# EAGLE board PIDDYBOT_V11 (EAGLE 7.1.0)
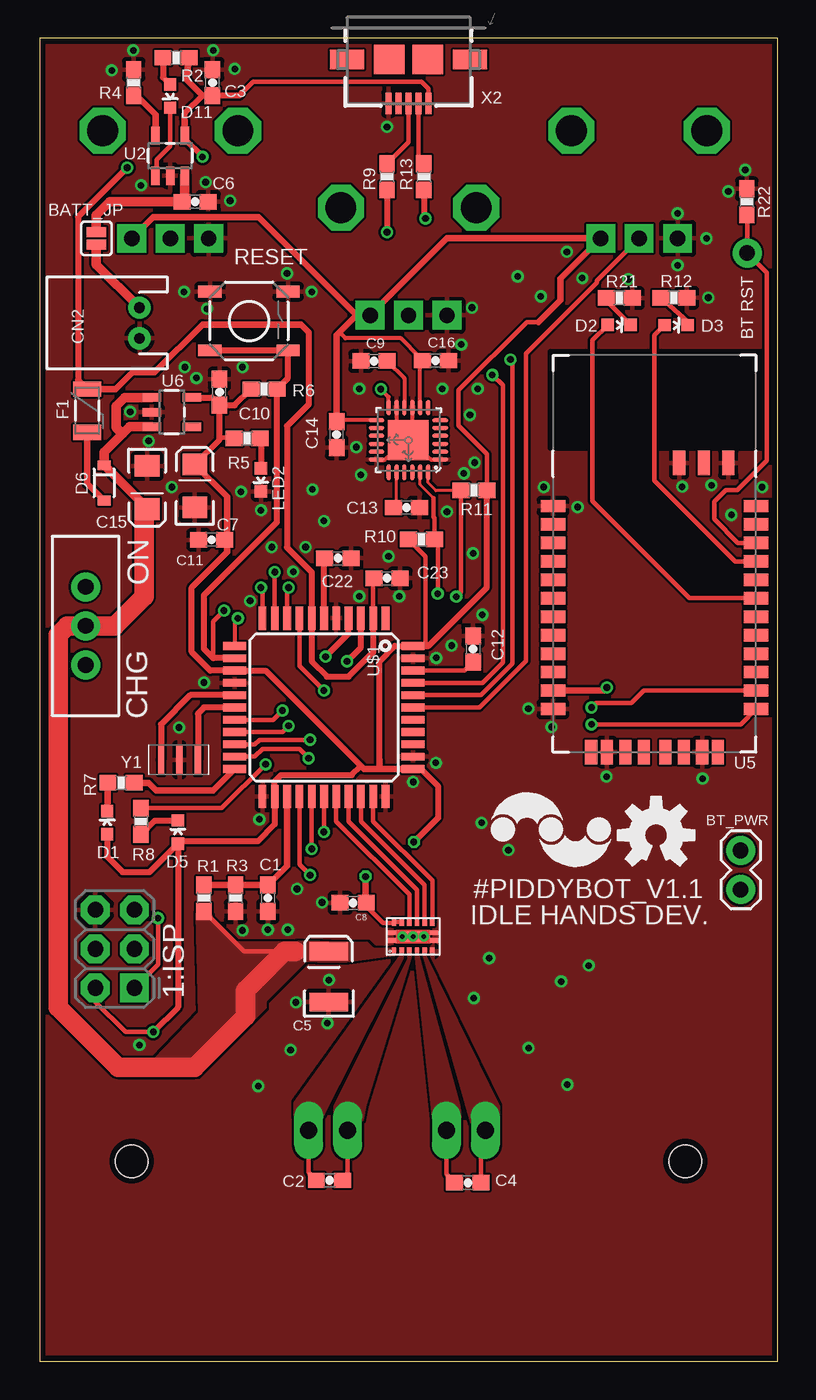
[diagram p0: board, top side]
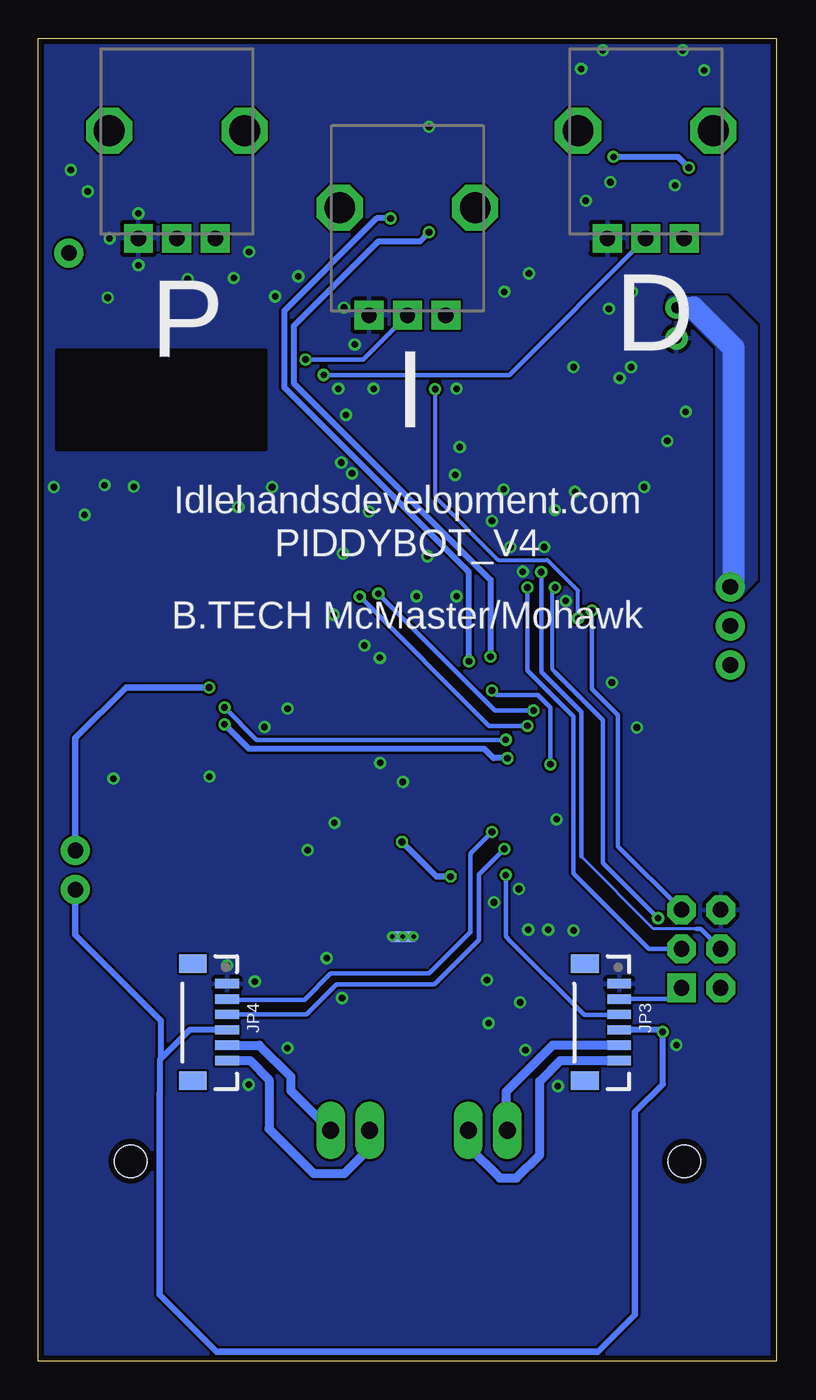
[diagram p1: board, bottom side, seen from below]

Size 48 x 86 mm. Coordinates in mm from the lower left corner, seen from the top.
Outline: 0,0 48,0 48,86 0,86 0,0
Copper layers (1*16): Top 0.0356mm / dielectric 1.5011mm / Bottom 0.0356mm
Design rules "LaenPCBOrder": minimum track width 6mil, minimum drill 13mil, track to track 6mil, track to pad 6mil, pad to pad 6mil, via to via 6mil, smd to smd 6mil, copper to edge 15mil, drill to drill 6mil, minimum pad ring 7mil, minimum via ring 7mil, stop-mask expansion 3mil, vias tented up to drill 0mil, thermal gap 10mil
Net classes: 0 default: width 0.203 mm; 1 vcc: width 0.254 mm
Holes 2.11 mm at 6,13 42,13

## Footprints (pad centres in the part's own frame; a part is rotated, then mirrored left to right if it is on the bottom)
SJ_2S = smd 0.635 x 1.27: 1 -0.412,0; 2 0.412,0
1X02 = drill 1.016 pad 1.88: 1 0,0; 2 2.54,0
0603-CAP = smd 1.1 x 1: 1 -0.85,0; 2 0.85,0
EIA3528 = smd 1.2 x 2.5: A 1.65,0; C -1.65,0
EIA3216 = smd 1.4 x 1.6: A 1.4,0; C -1.4,0
JST-2-PTH = drill 0.7 pad 1.448: 1 -1,0; 2 1,0
LED-0603 = smd 0.8 x 0.8: A 0,-0.75; C 0,0.75
SOD-323 = smd 0.63 x 0.83: 1 -1.15,0; 2 1.15,0
PTC-1206 = smd 1 x 1.8: 1 -1.4,0; 2 1.4,0
1X01NS = drill 1.016 pad 1.88: 1 0,0
1X06-1MM = smd 0.6 x 1.55: 1 -2.54,1.27; 2 -1.54,1.27; 3 -0.54,1.27; 4 0.46,1.27; 5 1.46,1.27; 6 2.46,1.27 | smd 1.2 x 1.8: P$1 -3.84,-0.955; P$2 3.76,-0.955
2X3-NS = drill 1.016 pad 1.88 square: 1 -2.54,-1.27 | drill 1.016 pad 1.88 octagon: 2 -2.54,1.27; 3 0,-1.27; 4 0,1.27; 5 2.54,-1.27; 6 2.54,1.27
1X02_LONGPADS = drill 1.118 pad 1.88 long: 1 0,0; 2 2.54,0
0603-RES = smd 1.1 x 1: 1 -0.85,0; 2 0.85,0
TACTILE_SWITCH_SMD = smd 1.524 x 0.762: 1 -2.54,1.905; 2 2.54,1.905; 3 -2.54,-1.905; 4 2.54,-1.905
SWITCH-SPDT = drill 1.016 pad 1.88: 1 0,2.54; 2 0,0; 3 0,-2.54
QFN-24-4MM2 = smd 1.016 x 0.254: 1 -2.066,1.257; 2 -2.066,0.75; 3 -2.066,0.247; 4 -2.066,-0.287; 5 -2.066,-0.792; 6 -2.066,-1.297; 13 2.086,-1.297; 14 2.086,-0.792; 15 2.086,-0.287; 16 2.086,0.247; 17 2.086,0.75; 18 2.086,1.257 | smd 0.254 x 1.016: 7 -1.267,-2.122; 8 -0.762,-2.122; 9 -0.258,-2.122; 10 0.278,-2.122; 11 0.78,-2.122; 12 1.287,-2.122; 19 1.287,2.082; 20 0.78,2.082; 21 0.278,2.082; 22 -0.258,2.082; 23 -0.762,2.082; 24 -1.267,2.082 | smd 2.616 x 2.616: P$1 0.02,-0.01
SOT23-5 = smd 0.55 x 1.2: 1 -0.95,-1.3; 2 0,-1.3; 3 0.95,-1.3; 4 0.95,1.3; 5 -0.95,1.3
RN41 = smd 0.8 x 1.6: 1 -6.6,-6.6; 2 -5.4,-6.6; 3 -4.2,-6.6; 4 -3,-6.6; 5 -1.8,-6.6; 6 -0.6,-6.6; 7 0.6,-6.6; 8 1.8,-6.6; 9 3,-6.6; 10 4.2,-6.6; 11 5.4,-6.6; 12 6.6,-6.6; 13 6.6,6.6; 14 5.4,6.6; 15 4.2,6.6; 16 3,6.6; 17 1.8,6.6; 18 0.6,6.6; 19 -0.6,6.6; 20 -1.8,6.6; 21 -3,6.6; 22 -4.2,6.6; 23 -5.4,6.6; 24 -6.6,6.6 | smd 1.6 x 0.8: 25 -9.4,4.8; 26 -9.4,3.2; 27 -9.4,1.6; 28 9.4,3.1; 29 9.4,-3.1; 30 9.4,-4.122; 31 9.4,-1.9; 32 9.4,-0.7; 33 9.4,0.7; 34 9.4,1.9; 35 9.4,4.122
SPARKFUN-DIGITALIC_TQFP44 = smd 1.5 x 0.5: 1 -5.8,4; 2 -5.8,3.2; 3 -5.8,2.4; 4 -5.8,1.6; 5 -5.8,0.8; 6 -5.8,0; 7 -5.8,-0.8; 8 -5.8,-1.6; 9 -5.8,-2.4; 10 -5.8,-3.2; 11 -5.8,-4; 23 5.8,-4; 24 5.8,-3.2; 25 5.8,-2.4; 26 5.8,-1.6; 27 5.8,-0.8; 28 5.8,0; 29 5.8,0.8; 30 5.8,1.6; 31 5.8,2.4; 32 5.8,3.2; 33 5.8,4 | smd 0.5 x 1.5: 12 -4,-5.8; 13 -3.2,-5.8; 14 -2.4,-5.8; 15 -1.6,-5.8; 16 -0.8,-5.8; 17 0,-5.8; 18 0.8,-5.8; 19 1.6,-5.8; 20 2.4,-5.8; 21 3.2,-5.8; 22 4,-5.8; 34 4,5.8; 35 3.2,5.8; 36 2.4,5.8; 37 1.6,5.8; 38 0.8,5.8; 39 0,5.8; 40 -0.8,5.8; 41 -1.6,5.8; 42 -2.4,5.8; 43 -3.2,5.8; 44 -4,5.8
WSON-12 = smd 0.28 x 0.5: P1 -1.25,-0.95; P2 -0.75,-0.95; P3 -0.25,-0.95; P4 0.25,-0.95; P5 0.75,-0.95; P6 1.25,-0.95; P7 1.25,0.95; P8 0.75,0.95; P9 0.25,0.95; P10 -0.25,0.95; P11 -0.75,0.95; P12 -1.25,0.95 | drill 0.3 pad 0.406: P$1 0,0; P$2 -0.7,0; P$3 0.7,0 | smd 0.635 x 0.305: THERM1 -1.4,-0.25; THERM2 1.4,-0.25; THERM3 1.4,0.25; THERM4 -1.4,0.25 | smd 1.6 x 0.7: THERMCENTER 0,0; THERMCENTER1 0,0 | smd 1.6 x 0.7 bottom: THERMCENTER2 0,0
ALPS_POT = drill 1 pad 1.88 square: P$1 7,-2.5; P$2 7,0; P$3 7,2.5 | drill 2 octagon: P$4 0,-4.4; P$5 0,4.4
USB_AB_MICRO_1:1_V2 = smd 1.4 x 0.4: D+ 2.85,0; D- 2.85,0.65; GND 2.85,-1.3; ID 2.85,-0.65; VBUS 2.85,1.3 | smd 1.9 x 2: P$6 0,1.25; P$7 0,-1.25 | smd 1.27 x 2.2: P$8 0,4; P$9 0,-4
CSTCR6M = smd 0.4 x 2: 1 -1.2,0; 2 0,0; 3 1.2,0

## Placement (x,y rotation side)
BATT_JP  [SJ_2S]  3.7,73 270 top
BT_PWR  M02PTH  [1X02]  45.6,33.2 270 top
C1  1uF  [0603-CAP]  14.85,30.1 270 top
C2  1uF  [0603-CAP]  18.85,11.75 180 top
C3  4.7uF  [0603-CAP]  11.25,83.12 90 top
C4  1uF  [0603-CAP]  27.85,11.6 0 top
C5  10uf , 20V  [EIA3528]  18.8,25 90 top
C6  4.7uF  [0603-CAP]  10.12,75.38 0 top
C7  10uF  [EIA3216]  10.1,56.9 90 top
C8  0.1uF  [0603-CAP]  20.4,29.8 180 top
C9  0.1uF  [0603-CAP]  21.75,65.03 180 top
C10  1uF  [0603-CAP]  11.7,63 90 top
C11  0.1uF  [0603-CAP]  11.2,53.4 0 top
C12  0.1uF  [0603-CAP]  28.2,46.3 270 top
C13  2.2nF  [0603-CAP]  23.88,55.5 0 top
C14  0.1uF  [0603-CAP]  19.32,60.25 270 top
C15  10uF  [EIA3216]  7,56.8 270 top
C16  10nF  [0603-CAP]  25.75,65.05 0 top
C22  1uF  [0603-CAP]  19.4,52.2 180 top
C23  1uF  [0603-CAP]  22.6,50.9 180 top
CN2  M02JST-PTH-2  [JST-2-PTH]  6.5,67.5 90 top
D1  Green  [LED-0603]  4.4,35 0 top
D2  Green  [LED-0603]  37.7,67.37 270 top
D3  Red  [LED-0603]  41.4,67.36 270 top
D5  Yellow  [LED-0603]  9,34.4 0 top
D6  [SOD-323]  4.2,57.1 270 top
D11  RED  [LED-0603]  8.5,82.25 180 top
F1  500mA  [PTC-1206]  3.1,61.8 270 top
JP2  M01SMDNS  [1X01NS]  46.02,72.05 0 top
JP3  [1X06-1MM]  11.5,22 270 bottom
JP4  [1X06-1MM]  37,22 270 bottom
JP5  [2X3-NS]  4.9,26.8 90 top
LED2  Red  [LED-0603]  14.4,57.3 180 top
LOGO1  IDLEHANDS_LOGOL  [IHD-LOGO-L]  33.3,34.6 0 top
LOGO2  OSHW-LOGOM  [OSHW-LOGO-M]  40.1,34.2 0 top
MTA  M02PTH3  [1X02_LONGPADS]  17.5,15 0 top
MTB  M02PTH3  [1X02_LONGPADS]  29,15 180 top
R1  1M  [0603-RES]  10.7,30.1 270 top
R2  330  [0603-RES]  8.88,84.75 0 top
R3  470k  [0603-RES]  12.75,30.1 90 top
R4  2K  [0603-RES]  6.12,83.12 90 top
R5  1K  [0603-RES]  13.5,60 180 top
R6  10K  [0603-RES]  14.6,63.2 180 top
R7  330  [0603-RES]  5.3,37.6 180 top
R8  330  [0603-RES]  6.6,35.1 270 top
R9  22  [0603-RES]  22.6,77 90 top
R10  10k  [0603-RES]  24.85,53.42 180 top
R11  10k  [0603-RES]  28.25,56.62 0 top
R12  330  [0603-RES]  41.25,69.13 0 top
R13  22  [0603-RES]  25,77 90 top
R21  330  [0603-RES]  37.71,69.12 0 top
R22  10K  [0603-RES]  46,75.38 270 top
RESET  RESET  [TACTILE_SWITCH_SMD]  13.62,67.62 0 top
S4  [SWITCH-SPDT]  3,47.8 0 top
U1  MPU-6050-1  [QFN-24-4MM2]  24,59.88 180 top
U2  MCP73831  [SOT23-5]  8.5,78.38 0 top
U5  BLUETOOTH-RN41  [RN41]  40,49 270 top
U6  MIC5219  [SOT23-5]  8.6,61.7 270 top
U$1  ATMEGA32U4TQFP  [SPARKFUN-DIGITALIC_TQFP44]  18.5,42.5 270 top
U$2  DRV8835  [WSON-12]  24.3,27.6 0 top
U$16  [ALPS_POT]  39,80 270 bottom
U$17  [ALPS_POT]  24,75 270 bottom
U$18  [ALPS_POT]  8.5,80 270 bottom
X2  [USB_AB_MICRO_1:1_V2]  24,84.62 270 top
Y1  8Mhz  [CSTCR6M]  9.1,39.1 180 top

## Library data of the parts
BATT_JP = SparkFun-Passives
BT_PWR CN2 JP3-JP5 MTA MTB = SparkFun-Connectors
C1-C16 C22 C23 D1-D3 D5 D6 D11 F1 JP2 LED2 R1-R13 R21 R22 RESET U2 U6 = SparkFun
LOGO1 = IdleHandsProject
LOGO2 = SparkFun-Aesthetics
S4 U$16-U$18 = SparkFun-Electromechanical
U1 X2 = Testing
U5 = ScratchPad
U$1 = SparkFun-DigitalIC
U$2 = scout
Y1 = murata-filter; MPN: CSTCE8M00G55-R0

## Nets
3.3V: BT_PWR.2 C7.A C8.1 C10.1 C11.2 C14.1 C16.1 D1.A D5.A JP3.4 JP4.4 JP5.2 R5.2 R6.2 R10.2 R11.2 U1.8 U1.13 U6.5 U$1.14 U$1.24 U$1.34 U$1.44 U$2.P11 U$2.P12 U$16.P$3 U$17.P$3 U$18.P$3
A01: C2.2 JP3.5 MTA.1 U$2.P2
A02: C2.1 JP3.6 MTA.2 U$2.P3
AIN1: U$1.29 U$2.P10
AREF: C12.2 U$1.42
AUX_SCL: U1.7
AUX_SDA: U1.6
B01: C4.2 JP4.5 MTB.1 U$2.P5
B02: C4.1 JP4.6 MTB.2 U$2.P4
BATT: C1.1 R1.1 R3.2 U$1.25
BIN1: U$1.31 U$2.P8
CTS: U5.16
D1: D3.C R12.1
D2: D2.C R21.1
D7: U$1.1
D14: R8.1 U$1.8
D+: R9.1 U$1.4
D-: R13.1 U$1.3
GND: C1.2 C3.2 C5.C C6.2 C7.C C8.2 C9.2 C10.2 C11.1 C12.1 C13.2 C14.2 C15.C C16.2 C22.1 C23.1 CN2.1 JP3.1 JP4.1 JP5.6 LED2.C R3.1 R4.2 R12.2 R21.2 R22.1 RESET.1 RESET.2 U1.1 U1.9 U1.11 U1.18 U2.2 U5.1 U5.12 U5.25 U5.27 U5.28 U5.29 U6.2 U$1.5 U$1.15 U$1.23 U$1.33 U$1.35 U$1.43 U$2.P6 U$2.P$1 U$2.P$2 U$2.P$3 U$2.THERM1 U$2.THERM2 U$2.THERM3 U$2.THERM4 U$2.THERMCENTER U$2.THERMCENTER1 U$2.THERMCENTER2 U$16.P$1 U$17.P$1 U$18.P$1 X2.GND Y1.2
INT: U1.12 U$1.12
MISO-MTE_A_1: JP3.2 JP5.1 U$1.11
MOSI: JP5.4 U$1.10
MTE_A_2: JP3.3 U$1.26
MTE_B_1: JP4.3 U$1.27
MTE_B_2: JP4.2 U$1.28
N$1: U$1.17 Y1.1
N$2: U$1.16 Y1.3
N$3: D6.2 F1.2
N$4: U$1.36
N$6: C13.1 U1.20
N$7: C9.1 U1.10
N$8: U$1.37
N$9: D3.A U5.21
N$10: U$1.38
N$11: D2.A U5.19
N$12: BT_PWR.1 U5.11
N$13: D11.A R2.1
N$14: BATT_JP.1 C6.1 U2.3
N$15: C22.2 U$1.6
N$16: R13.2 X2.D-
N$17: R9.2 X2.D+
N$19: D5.C R8.2
N$20: D1.C R7.2
N$38: LED2.A R5.1
PIO4: JP2.1 R22.2 U5.22
POTD: U$1.41 U$18.P$2
POTI: U$1.40 U$17.P$2
POTP: U$1.39 U$16.P$2
PROG: R4.1 U2.5
PWMA: U$1.30 U$2.P9
PWMB: U$1.32 U$2.P7
RAW: C5.A C15.A D6.1 R1.2 S4.2 U6.1 U6.3 U$2.P1
RESET: JP5.5 R6.1 RESET.3 RESET.4 U$1.13
RTS: U5.15
RX-I: U5.14 U$1.20
SCK: JP5.3 U$1.9
SCL: R10.1 U1.23 U$1.18
SDA: R11.1 U1.24 U$1.19
STAT: D11.C U2.1
TX-O: U5.13 U$1.21
TXLED: R7.1 U$1.22
UVCC: C3.1 C23.2 F1.1 R2.2 U2.4 U$1.2 U$1.7 X2.VBUS
V_BATT: BATT_JP.2 CN2.2 S4.1

## Tracks (layer width: path | path; a pad name or v marks a point on that pad's centre or on a via)
3.3V  (via drill 0.43)
  Top 0.254: U1.13 19.4,61.17 C14.1 | 24.9,65.1 C16.1 24.76,64.91 | 24.76,64.91 24.76,65.24 23.5,66.5 19.9,66.5 19.56,66.84 19.46,66.84 | U1.8 24.76,64.91
  Top 0.3: R11.2 29.1,58.98 27.25,60.83 27.25,63.12 31.69,67.56 32.44,67.56 | 5.59,21.4 v7.4,21.4 | 25.1,51.2 25.1,46.5 | C8.1 21.25,29.68 arc45 21.31,29.54 22.35,28.5 22.93,28.5 arc45 U$2.P12 U$2.P11
  Top 0.305: 12.7,60.05 11.7,60.05 11.7,59.9 | 25.1,51.2 25.1,52.33 R10.2 | JP5.2 3.63,23.36 5.59,21.4
  Top 0.4: 13.6,63.05 R6.2 12.7,62.15 C10.1 | U6.5 11.2,62.65 C10.1 | 12.7,60.05 R5.2 | C10.1 11.7,59.9 C7.A 12.2,56.2 | 12.2,52.6 9.9,50.3 9.9,46.1 11.1,44.9 U$1.14 14.7,44.9 20.9,38.7 | 20.9,38.7 21.1,38.5 | D5.A 9.15,33.8 14.2,33.8 15.3,34.9 U$1.24 15.3,37.7 15.7,38.1 20.3,38.1 20.9,38.7 | D1.A 4.4,32.8 5.4,31.8 7.15,31.8 D5.A | D5.A 9,23 v7.4,21.4 | 22.1,39.1 22.1,45.5 23.1,46.5 U$1.44 25.1,46.5 25.3,46.5 29.1,50.3 R11.2 | U$1.34 24.8,38.5 25.9,37.4 25.9,35.3
  Top 0.406: 20.62,68 U$17.P$3 26.5,73 U$16.P$3 33.88,70.38 33.88,69 32.44,67.56 | 20.62,68 14.25,74.38 7.38,74.38 U$18.P$3 | 12.2,56.2 12.2,53.55 C11.2 12.2,53.25 12.2,52.6 | 21.1,38.5 22.1,38.5 | 22.1,38.5 U$1.34 | 22.1,39.1 22.1,38.5 | 25.9,35.3 v24.35,33.75 | v21.2,31.5 21.2,29.92 arc45 C8.1 | 20.62,68 19.46,66.84 19.32,66.7 C14.1
  Bottom 0.4: JP3.4 7.54,21.54 v7.4,21.4 7.4,18 | JP4.4 38.16,21.54 40.05,19.65 | 40.05,19.65 40.1,19.6 40.1,17.4 | 40.05,22.15 40.05,19.65
  Bottom 0.406: v24.35,33.75 22.16,31.56 arc-45 22.02,31.5 v21.2,31.5 | 7.4,18 9.2,16.2 9.2,3 11.6,0.6 36.4,0.6 40.1,4.3 40.1,17.4 | 40.05,22.15 45.6,27.7 BT_PWR.2
A01
  Top 0.3: MTA.1 17.5,12.33 arc45 17.56,12.19 C2.2
  Bottom 0.6: JP3.5 14.56,20.54 17.59,17.51 17.59,15.09 MTA.1
  pour Top (no thermals): 23.45,26.6 23.65,26.6 23.65,26.15 18.45,15.9 16.55,15.9 16.55,16.8 23.45,26.35
A02
  Top 0.3: C2.1 19.98,12.03 arc45 20.04,12.17 MTA.2
  Bottom 0.6: MTA.2 20.04,13.94 18,11.9 16.9,11.9 15.4,13.4 15.4,18.2 14.06,19.54 JP3.6
  pour Top (no thermals): 23.95,26.65 23.95,26.15 19.15,16.6 19.15,15.65 21.05,15.65 21.25,16.65 24.15,26.2 24.15,26.65
AIN1
  Top 0.3: U$1.29 19.3,35.1 24.05,30.35 U$2.P10
AREF
  Top 0.3: U$1.42 27.65,44.9 C12.2
B01
  Top 0.3: MTB.1 28.76,14.76 arc45 28.7,14.62 C4.2
  Bottom 0.6: JP4.5 33.64,20.54 31.6,18.5 31.6,17.6 MTB.1
  pour Top (no thermals): 24.95,26.65 24.95,26.45 28.05,15.45 29.9,16 29.9,16.55 25.15,26.35 25.15,26.65
B02
  Top 0.3: C4.1 26.52,12.08 arc-45 26.46,12.22 MTB.2
  Bottom 0.6: JP4.6 34.24,19.54 33,18.3 33,15.1 30.1,12.2 28.1,12.2 26.46,13.84 MTB.2
  pour Top (no thermals): 24.45,26.65 24.45,26.2 25.55,15.85 27.4,15.8 27.35,16.55 24.65,26.45 24.65,26.65
BATT
  Top 0.406: R1.1 R3.2 C1.1 16.1,32.2 U$1.25
BIN1
  Top 0.3: U$1.31 20.9,35.1 25.05,30.95 U$2.P8
D1
  Top 0.3: D3.C 42.15,67.59 R12.1
D2
  Top 0.3: D2.C 37.06,68.76 R21.1
D14  (via drill 0.43)
  Top 0.3: R8.1 11.85,35.95 v14.7,38.8 | v18.5,43.6 16.9,45.2 U$1.8
  Bottom 0.3: v14.7,38.8 14.7,42.5 15.5,43.3 18.2,43.3 v18.5,43.6
D+  (via drill 0.43)
  Top 0.4: R9.1 v22.6,73.4 | v18.6,45.8 20.1,47.3 U$1.4
  Bottom 0.4: v22.6,73.4 23.2,72.8 25.9,72.8 31.4,67.3 31.4,63.6 18.6,50.8 v18.6,45.8
D-  (via drill 0.43)
  Top 0.4: R13.1 25,74.4 v25.1,74.3 | v20,45.5 20.9,46.4 U$1.3
  Bottom 0.4: v25.1,74.3 26,74.3 32,68.3 32,63.3 20,51.3 v20,45.5
GND  (via drill 0.43)
  Top 0.254: U1.11 23.22,61.18 23.7,60.7 23.9,60.7 24.26,61.06 U1.9 | 22.8,58.9 22.4,58.6 21.9,58.6 U1.18 | 26.08,58.6 25.5,58.6 25.1,58.9 | 26.1,58.6 26.08,58.6 | 26.08,58.6 U1.1
  other vias: 24.3,37.65 20.6,59.42 27.43,66.1 36.88,38 43.12,37.88 28.75,35 14.85,28.05 28.12,68.5 41.5,74.62 43.38,73 41.5,71.25 17.75,56.67 9.4,69.53 10.9,68.42 16.1,70.72 17.7,69.53 35,55.52 45,55.02 47,56.83 32.8,56.83 31.8,42.42 33.3,41.23 28.8,48.52 26.8,46.52 30.5,33.23 6.5,20.55 23.4,49.73 22.7,52.33 20.8,49.73 14.3,35.23 8.6,56.83 7.1,59.83 9.45,64.62 12.7,84.03 11.3,85.22 6.1,85.22 4.7,83.92 20.8,63.23 26.2,63.23 31.1,70.53 32.6,69.22 34.3,72.12 35.3,70.42 28.5,63.23 28,61.52 10.2,63.92 13.2,64.62 5.9,61.73 14.4,55.33 13.1,56.52 38.3,70.35 43.5,69.15 44.8,76.05 45.9,77.45 22.6,80.25 6.6,76.45 10.8,76.65 12.4,75.45 35.73,25.71 33.92,24.68 9.07,41.2 25.77,38.9 34.33,17.98 14.22,17.88 17.3,52.92 15.1,52.92 25.8,45.73 10.7,44.12 28.3,58.42 27.6,57.73 43.7,56.95 41.8,56.85 13.7,49.42 16.5,51.33 18.5,54.62 26.5,55.23 28.2,52.52 20.9,57.62 13.2,28 16.75,30.7 16.15,28.05 31.8,20.36 16.32,20.23 16.68,23.32 18.82,24.77 18.73,21.98 18.38,29.82 28.25,23.6 29.25,26.2
  pour Top (rank 6): 0,0 48,0 48,86 0,86
  pour Bottom (rank 6): 0,0 48,0 48,86 0,86
INT  (via drill 0.43)
  Top 0.254: U1.12 22.71,62.69 v22.2,63.2 | U$1.12 12.7,48.1 v12.9,48.3
  Bottom 0.254: v22.2,63.2 22.2,56.2 18.1,52.1 14.9,52.1 12.9,50.1 v12.9,48.3
MISO-MTE_A_1  (via drill 0.43)
  Top 0.3: U$1.11 14.5,50.2 v14.4,50.3 | v7.7,28.8 7.7,26.19
  Top 0.305: 7.7,26.19 7.7,25.79 JP5.1
  Bottom 0.254: v14.4,50.3 14.4,50.2 14.6,50 14.6,45 14.4,44.8
  Bottom 0.3: 14.4,44.8 11.3,41.7 11.3,32.4 v7.7,28.8
  Bottom 0.305: JP3.2 6.89,23.54 JP5.1
MOSI  (via drill 0.43)
  Top 0.3: U$1.10 v15.3,51.3
  Bottom 0.2: 5.2,28.1 8,28.1 12.7,32.8
  Bottom 0.3: v15.3,51.3 15.3,44.8 12.7,42.2 12.7,32.8
  Bottom 0.305: 5.2,28.1 4.93,28.1 JP5.4
MTE_A_2  (via drill 0.43)
  Top 0.305: v17.6,31.6 16.9,32.3 U$1.26
  Bottom 0.3: 17.3,27.3 12.5,22.5 10.27,22.5 JP3.3
  Bottom 0.305: 17.3,27.3 17.6,27.6 v17.6,31.6
MTE_B_1  (via drill 0.43)
  Top 0.3: U$1.27 v17.7,33.3
  Bottom 0.3: JP4.3 30.56,22.54 28.6,24.5 22.33,24.5 arc-45 22.19,24.56 19.35,27.4 19.35,31.57 arc45 19.29,31.71 v17.7,33.3
MTE_B_2  (via drill 0.43)
  Top 0.3: U$1.28 v18.5,34.4
  Bottom 0.3: JP4.2 35.69,23.5 30.7,23.5 29,25.2 22.68,25.2 arc-45 22.54,25.26 19.9,27.9 19.9,32.92 arc45 19.84,33.06 v18.5,34.4
N$1
  Top 0.4: U$1.17 10.7,42.5 10.3,42.1 Y1.1
N$2
  Top 0.4: U$1.16 9.8,43.3 7.9,41.4 Y1.3
N$3
  Top 0.406: F1.2 3.1,57.05 D6.2
N$5
  cutout Bottom: 33.2,65.7 46.8,65.7 46.8,59.3 33.2,59.3
  cutout Top: 33.2,65.7 46.8,65.7 46.8,59.3 33.2,59.3
N$6
  Top 0.2: U1.20 23.22,55.7 C13.1
N$7
  Top 0.254: C9.1 23.72,63.9 U1.10
N$9
  Top 0.3: U5.21 45.25,52 40,57.25 40,66.71 D3.A
N$11
  Top 0.3: U5.19 42.27,49.6 35.95,55.92 35.95,66.37 D2.A
N$12  (via drill 0.43)
  Top 0.406: v36.9,43.8 36.7,43.6 U5.11
  Bottom 0.406: BT_PWR.1 45.6,40.5 42.3,43.8 v36.9,43.8
N$13
  Top 0.4: R2.1 8.03,83.47 D11.A
N$14
  Top 0.61: U2.3 9.45,75.55 C6.1 4.58,75.38 3.7,74.5 BATT_JP.1
N$15
  Top 0.4: U$1.6 18.5,52.15 C22.2
N$16
  Top 0.3: X2.D- 24.65,78.2 R13.2
  Top 0.4: 24.85,78 R13.2
N$17
  Top 0.3: X2.D+ 24,79.25 R9.2
  Top 0.4: R9.2 22.6,78.22
N$19
  Top 0.4: R8.2 7.5,35.15 D5.C
N$20
  Top 0.406: D1.C R7.2
N$38
  Top 0.4: R5.1 14.4,59.95 LED2.A
PIO4
  Top 0.3: U5.22 45.42,53.2 43.88,54.75 43.88,55.88 44.62,56.62 45.38,56.62 47.3,58.55 47.3,70.78 JP2.1 46.02,74.7 R22.2
POTD  (via drill 0.43)
  Top 0.3: v29.45,64.12 30.12,63.45 30.12,45.42 28.8,44.1 U$1.41
  Bottom 0.3: v29.45,64.12 17.38,64.12 U$18.P$2
POTI  (via drill 0.43)
  Top 0.3: 30.62,65 v30.62,65.12 30.75,65 30.75,45.35 28.7,43.3 U$1.40
  Bottom 0.3: v30.62,65.12 26.88,65.12 U$17.P$2
POTP
  Top 0.3: U$16.P$2 36.25,70.25 36.25,70.12 31.62,65.5 31.62,45.52 28.6,42.5 U$1.39
PROG
  Top 0.4: R4.1 6.33,82.28 7.55,81.05
  Top 0.406: 7.55,81.05 U2.5
PWMA
  Top 0.3: U$1.30 20.1,35.1 24.55,30.65 U$2.P9
PWMB
  Top 0.3: U$1.32 21.7,35.1 25.55,31.25 U$2.P7
RAW
  Top 0.305: 16.65,26.65 13.3,26.65 R1.2
  Top 0.61: 5.4,60.3 4.2,59.1 D6.1 7,55.45 C15.A 6.8,55.2 | 5.4,60.3 5.85,60.75 U6.3 | U6.1 5.55,62.65 5,62.1 5,60.7 5.4,60.3
  Top 1.27: 6.8,55.2 6.8,49.7 4.9,47.8 S4.2 1.8,47.8 1.2,47.2 1.2,23 5.1,19.1 10.1,19.1 13.4,22.4 13.4,24.1 15.95,26.65 16.65,26.65
  pour Top (no thermals): 16.8,27.2 18.2,27.2 18.96,26.1 16.8,26.1
  pour Top (no thermals): 5.46,19.52 7.56,19.52 10.5,22.6 10.36,29.04 10.5,29.32 10.64,29.32 11.06,28.9 11.06,28.76 12.74,27.08 18.76,27.08 19.04,26.8 19.04,26.24 17.36,26.24 14.56,23.44 14.56,23.02 10.22,18.68 6.58,18.68
  pour Top (no thermals): 18.1,27.2 21.3,27.2 21.7,26.8 23.1,26.8 23.1,26.4 20,26 18.1,26
RESET  (via drill 0.43)
  Top 0.3: 11.3,45.7 11.3,48.1 v12,48.8
  Top 0.4: RESET.3 RESET.4 16.16,63.91 R6.1 15.45,54.55 10.7,49.8 10.7,46.3 11.3,45.7 U$1.13
  Bottom 0.3: v12,48.8 12,43.7 10.3,42 10.3,33.87
  Bottom 0.305: 10.3,33.87 10.3,33.47 JP5.5
RX-I  (via drill 0.43)
  Top 0.3: U$1.20 14,40.1 14.3,40.4 v17.6,40.4 | v35.9,42.5 36.2,42.8 38.5,42.8 39.3,43.6 U5.14
  Bottom 0.3: v17.6,40.4 33.8,40.4 v35.9,42.5
SCK  (via drill 0.43)
  Top 0.3: U$1.9 16.1,50.2 v16.2,50.3
  Bottom 0.3: v16.2,50.3 16.2,44.9 13.2,41.9 13.2,31.7 8.3,26.8
  Bottom 0.305: 8.3,26.8 JP5.3
SCL  (via drill 0.43)
  Top 0.2: 25.62,56.12 24.75,57 U1.23
  Top 0.3: 25.62,54.88 25.62,56.12 | U$1.18 15.2,41.7 v15.8,42.3
  Top 0.305: v25.9,49.9 25.9,53.23 R10.1 25.7,54.8 25.62,54.88
  Bottom 0.3: v15.8,42.3 18.3,42.3 v25.9,49.9
SDA  (via drill 0.43)
  Top 0.2: U1.24 25.27,57.11 25.77,56.6 27.38,56.6 R11.1
  Top 0.3: U$1.19 15.8,40.9 v16.2,41.3 | v27.1,49.7 27.4,50 R11.1
  Bottom 0.3: v16.2,41.3 18.7,41.3 v27.1,49.7
STAT
  Top 0.305: U2.1 7.62,77.08 7.62,78.12 8.5,79 D11.C
TX-O  (via drill 0.43)
  Top 0.3: U$1.21 14,39.3 14.5,39.8 16.9,39.8 v17.5,39.2 | 46.4,42.2 U5.13 45.6,41.4 v35.9,41.4
  Bottom 0.4: v17.5,39.2 18.4,39.2 19,39.8 34.3,39.8 v35.9,41.4
TXLED
  Top 0.4: 11.4,37.2 U$1.22
  Top 0.406: R7.1 7.1,37.6 7.6,37.1 11.3,37.1 11.4,37.2
UVCC  (via drill 0.43)
  Top 0.3: 11.43,82.3 C3.1 | C23.2 21.7,50.85 U$1.2 | 13.18,82.47 13.9,83.2 24.83,83.2 25.3,82.73 X2.VBUS
  Top 0.4: U2.4 9.45,79.45 v10.6,78.3 | v5.7,77.6 2.5,74.4 2.5,63.8 F1.1 | 17,67.4 17.5,66.9 17.5,62.2 16.1,60.8 16.1,52.9 17.7,51.3 U$1.7 17.7,45.5 18.7,44.5 20.1,44.5 21.7,46.1 U$1.2 | C3.1 10.6,82.28 | 10.6,82.28 10.4,82.47 | 11.43,82.3 13,82.3 13.18,82.47 | 9.45,80.67 9.45,81.12 10.6,82.28
  Top 0.406: 9.45,80.67 U2.4 | 10.4,82.47 9.53,83.35 R2.2 | F1.1 4.95,63.2 6.05,64.3 7.5,64.3 10.6,67.4 17,67.4
  Bottom 0.4: v10.6,78.3 6.4,78.3 v5.7,77.6
V_BATT
  Top 0.61: CN2.2 3.7,71.3 BATT_JP.2
  Bottom 1.27: 2.8,50.54 S4.1
  Bottom 1.422: CN2.2 5.4,68.5 2.8,65.9 2.8,50.54
  pour Bottom (no thermals): 6.86,69.08 3.22,69.08 1.4,67.26 1.4,50.88 2.52,49.76 3.36,49.76 3.78,50.18 3.78,66 6.02,68.24 6.86,68.24 7,68.38 7,68.8 6.86,68.94

## Text on the board
tNames: BT RST | ON | CHG | #PIDDYBOT_V1.1 | IDLE HANDS DEV. | 1:ISP
bNames: D | P | I | Idlehandsdevelopment.com | PIDDYBOT_V4 | B.TECH McMaster/Mohawk